# Altium PCB RM04-StartKitV1.4.PcbDoc
Units mm, origin at the board's own origin, x right, y up, seen from the top; angles counter-clockwise.
Board outline 152.4 x 101.6 mm, 2 copper layers (Top Layer, Bottom Layer); 36 components, 46 nets, 166 pads, 30 vias.
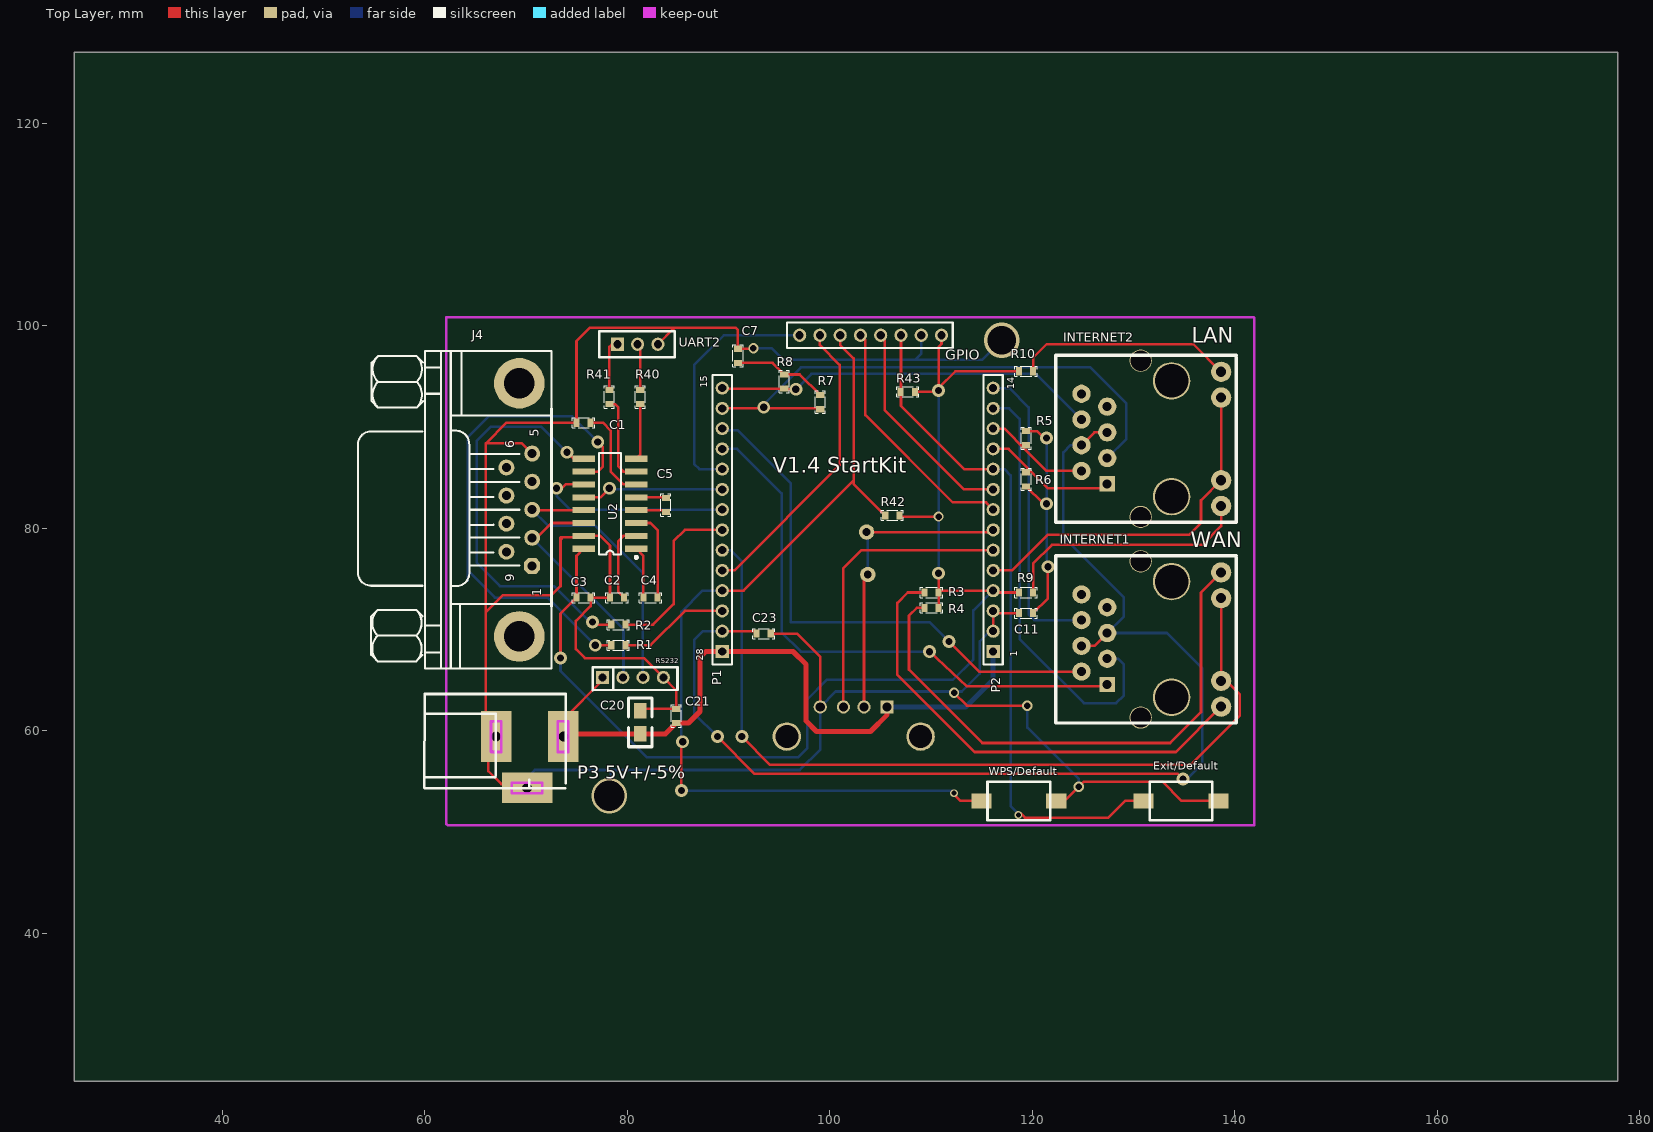
[diagram p0: Top Layer view]
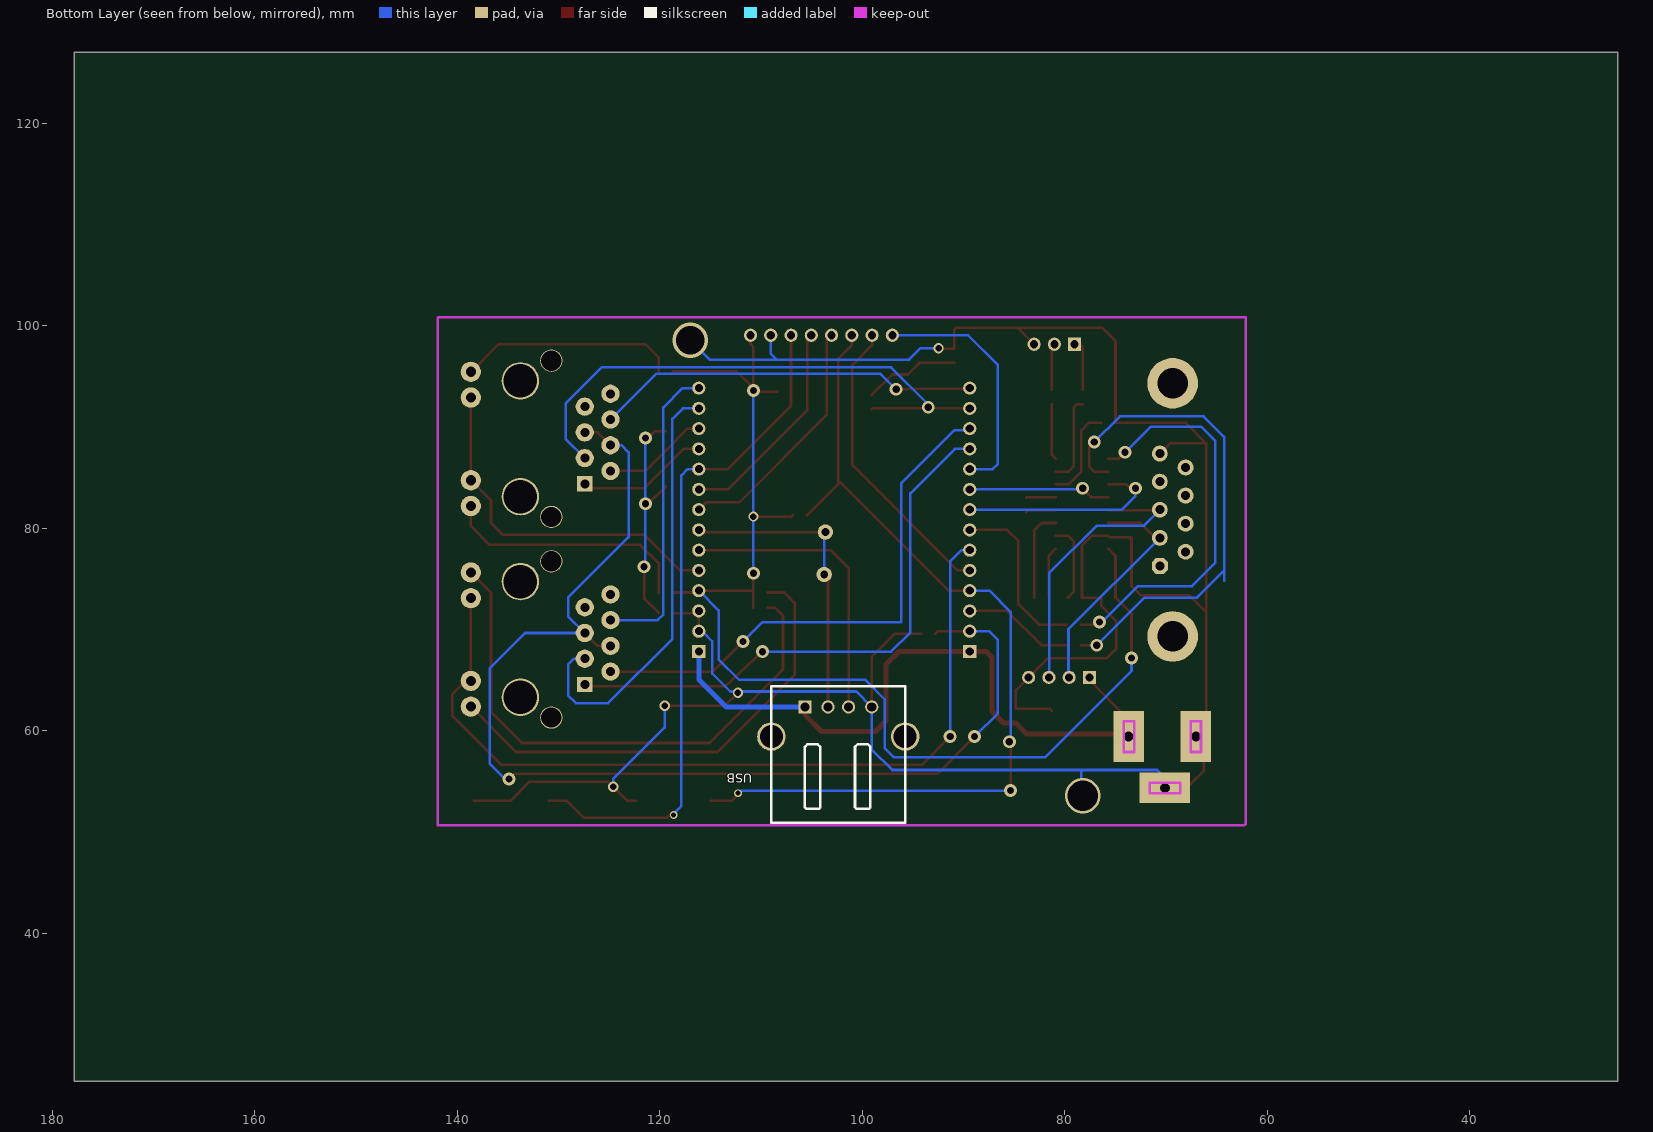
[diagram p1: Bottom Layer view, seen from below]

## Layer stack, top to bottom
Top Layer: signal copper 0.0356
Dielectric: dielectric 0.32, FR-4, Dk 4.8
Bottom Layer: signal copper 0.0356

## Board outline
25.4,25.4 177.8,25.4 177.8,127 25.4,127

## Design rules (kind name [scope] priority, off if disabled: settings)
Clearance [All] p1: gap=0.254
PolygonConnect [All] p1: connectstyle=Relief reliefconductorwidth=0.254 reliefentries=4 polygonreliefangle="90 Angle"
RoutingVias [All] p1: holewidth=0.711 width=1.27 viastyle="Through Hole" minholewidth=0.711 minwidth=1.27 maxholewidth=0.711 maxwidth=1.27
SilkscreenOverComponentPads [All] p1: minsilkscreentomaskgap=0.254
SolderMaskExpansion [All] p1: expansion=0.102
TestPointUsage [All] p1: valid=0 allowmultiple=FALSE
Testpoint [All] p1: side=15 testpointundercomponent=TRUE minsize=1.016 maxsize=2.54 preferedsize=1.524 minholesize=0 maxholesize=1.016 preferedholesize=0.813 testpointgrid=0.025 style=1023 order=0123456789
Width [All] p1: maxlimit=0.5 minlimit=0.254 preferedwidth=0.254 toplayer_prefwidth=0.3 bottomlayer_prefwidth=0.3 minimp=50.000000 maximp=50.000000 favimp=50.000000
23 further rules are at their usual default settings.

## Classes and differential pairs
component class RM04-KIT: C1 C2 C3 C4 C5 C7 C11 C20 C21 C23 ENTERNET2 INTERNET1 INTERNET2 J4 P1 P2 P3 "P3 5V+/-5%" R1 R2 R3 R4 R5 R6 R7 R8 R9 R10 U2 UART2 USB

## Components (designator, comment, footprint, x,y, rotation, side; value= is the part's Value field where it differs from the comment)
C1 "105" 0603 75.692,90.424 r0 top
C2 "105" 0603 78.994,73.152 r0 top
C3 "105" 0603 75.692,73.152 r180 top
C4 "105" 0603 82.296,73.152 r0 top
C5 "105" 0603 83.82,82.296 r90 top
C7 "0.01u" 0603 90.932,97.028 r270 top
C11 "0.01u" 0603 119.38,71.628 r0 top
C20 "10u" 0805 81.28,61.976 r270 top
C21 "0.01u" 0603 84.836,61.468 r270 top
C23 "0.01u" 0603 93.472,69.596 r180 top
Exit/Default "SW-PROG" SWITCH 131.572,53.086 r0 top
GPIO "Comment" HDR1X8 97.028,99.06 r0 top
INTERNET1 "HR911105A" HR911105A 132.08,69.596 r0 top
INTERNET2 "HR911105A" HR911105A 132.08,89.408 r0 top (schematic designator ENTERNET2)
J4 "DB9" DB9S 70.612,87.376 r90 top
P1 "Header 14" H1*14-2.0 89.324,67.818 r90 top
P2 "Header 14" H1*14-2.0 116.078,67.818 r90 top
"P3 5V+/-5%" "Header 3" POWER_STK1 70.612,59.436 r0 top (schematic designator P3)
R1 "0" 0603 79.121,68.453 r0 top
R2 "0" 0603 79.121,70.485 r0 top
R3 "660" 0603 110.044,73.66 r180 top
R4 "660" 0603 110.044,72.136 r0 top
R5 "50" 0603 119.38,88.9 r90 top
R6 "50" 0603 119.38,84.836 r90 top
R7 "50" 0603 99.06,92.456 r90 top
R8 "50" 0603 95.504,94.488 r90 top
R9 "660" 0603 119.38,73.66 r0 top
R10 "660" 0603 119.38,95.504 r180 top
R40 "0" 0603 81.28,92.964 r270 top
R41 "0" 0603 78.232,92.964 r270 top
R42 "0" 0603 106.172,81.28 r180 top (schematic designator R1)
R43 "0" 0603 107.696,93.472 r0 top (schematic designator R1)
U2 "MAX232ACPE" MAX3232 79.756,87.376 r270 top
UART2 "Header 2" MHDR2 79.756,98.044 r0 top
USB "Header 4" USB-ACPT 102.108,62.484 r270 bottom
WPS/Default "SW-PROG" SWITCH 115.57,53.086 r0 top

## Footprints (in the part's own frame and the unit in brackets; to place one, negate y for a bottom-side part, rotate by r counter-clockwise, add the part's x,y. Pads: shape width x height; smd on the part's side, far side on the other; paste and mask are expansions set on the pad)
0603 [mm]
  rect 0.6x0.8 smd: 1(-0.7,0) 2(0.7,0)
  silkscreen extent -1.1,-0.5 1.1,0.5
0805 [mil]
  rect 60x50 smd: 1(-0.2,0.24) 2(89.8,0.24)
  silkscreen extent -50,-45 140,45
DB9S [mil]
  oct 62x62 hole 35: 1(-436.67,0)
  round 62 hole 35: 2(-327.5,0) 5(0,0) 6(-54.17,100) 7(-163.33,100) 8(-272.5,100) 9(-381.67,100)
  round 62.01 hole 35: 3(-218.35,0) 4(-109.17,0)
  round 196.67 hole 118.33: BO1(-710.83,50) BO2(273.33,50)
  silkscreen extent -835,-75 398,677
H1*14-2.0 [mm]
  rect 1.3x1.3 hole 0.8: 1(0.022,-0.054)
  round 1.3 hole 0.8: 2(2.022,-0.054) 3(4.022,-0.054) 4(6.022,-0.054) 5(8.022,-0.054) 6(10.022,-0.054) 7(12.022,-0.054) 8(14.022,-0.054) 9(16.022,-0.054) 10(18.022,-0.054) 11(20.022,-0.054) 12(22.022,-0.054) 13(24.022,-0.054) 14(26.022,-0.054)
  silkscreen extent -1.25,-1 27.32,0.9
HDR1X8 [mm] "Connector; Header; 8 Position"
  round 1.3 hole 0.8: 1(0,0) 2(2,0) 3(4,0) 4(6,0) 5(8,0) 6(10,0) 7(-405.197,0) 8(12,0)
  silkscreen extent -1.27,-1.27 15.11,1.27
HR911105A [mm]
  rect 1.5x1.5 hole 0.889: 1(-4.684,-5.017)
  round 1.8 hole 0.889: 2(-7.224,-3.747) 3(-4.684,-2.477) 4(-7.224,-1.207) 5(-4.684,0.063) 6(-7.224,1.333) 7(-4.684,2.603) 8(-7.224,3.873)
  round 2 hole 1: 9(6.566,-7.207) 10.(6.566,-4.667) 11(6.566,3.503) 12(6.566,6.043)
  round 2.2 hole 2: ""(-1.384,-8.287) ""(-1.384,7.143)
  round 3.7 hole 3.302 unplated: ""(1.666,-6.287) ""(1.666,5.143)
  silkscreen extent -9.76,-8.83 8.06,7.68
MAX3232 [mm]
  rect 0.6x2.2 smd: 1(9.398,1.136) 2(8.128,1.136) 3(6.858,1.136) 4(5.588,1.136) 5(4.318,1.136) 6(3.048,1.136) 7(1.778,1.136) 8(0.508,1.136) 9(0.508,-4.064) 10(1.778,-4.064) 11(3.048,-4.064) 12(4.318,-4.064) 13(5.588,-4.064) 14(6.858,-4.064) 15(8.128,-4.064) 16(9.398,-4.064)
  silkscreen extent -0.05,-2.56 10.37,1.26
MHDR2 [mm] "Connector; Header; 4 Position"
  rect 1.3x1.3 hole 0.8: 1(-0.73,0.127)
  round 1.3 hole 0.8: 2(1.27,0.127)
  silkscreen extent -2.54,-1.14 4.95,1.4
POWER_STK1 [mm]
  rect 3x5 hole 1: 1(3.075,0) 3(-3.556,0)
  rect 5x3 hole 1: 2(-0.5,-5.075)
  Keep-Out Layer lines w0.254: -4.064,-1.524 -3.048,-1.524 -3.048,1.524 -4.064,1.524 -4.064,-1.524 ; -2.032,-5.588 -2.032,-4.572 1.016,-4.572 1.016,-5.588 -2.032,-5.588 ; 2.54,-1.524 3.556,-1.524 3.556,1.524 2.54,1.524 2.54,-1.524
  silkscreen extent -10.64,-5.09 3.3,4.2
SWITCH [mm]
  rect 2x1.5 smd: 1(-0.6,0) 2(6.8,0)
  silkscreen extent 0,-1.9 6.2,1.9
USB-ACPT [mil]
  rect 51.18x51.18 hole 35.5: 1(5,-140)
  round 51.18 hole 35.5: 2(5,-50) 3(5,30) 4(5,120)
  round 110.67 hole 90 unplated: ""(120,-270) ""(120,250)
  silkscreen extent -75,-270 455,250

## Part data
C1 C2 C3 C4 C5: library part Cap, "Capacitor"
C7 C11 C20 C21 C23: library part CAP, "Capacitor"
J4: library part CON9, "Connector"
P1 P2: "Header, 14-Pin"
"P3 5V+/-5%": "Header, 3-Pin"
R1 R2 R3 R4 R5 R6 R7 R8 R9 R10 R40 R41 R42 R43: library part RES2
U2: "+5V Powered, Multi-Channel RS-232 Driver/Receiver"
UART2: "Header, 2-Pin"
USB: "Header, 4-Pin"

## Free pads (board coordinates)
  round 1.3 hole 0.8: 0(83.026,98.171) 6(79.566,65.278) 7(81.566,65.278) 8(83.566,65.278) 9(111.028,99.06)
  round 1.524 hole 0.762: 2(103.759,75.438) 3(103.632,79.629)
  rect 1.3x1.3 hole 0.8: 5(77.566,65.278)

## Via types
v1: diameter 1.27, hole 0.711, Top Layer to Bottom Layer, 21 vias
v2: diameter 1.016, hole 0.635, Top Layer to Bottom Layer, 5 vias
v3: diameter 0.762, hole 0.508, Top Layer to Bottom Layer, 2 vias
v4: diameter 3.5, hole 2.8, Top Layer to Bottom Layer, 1 vias
v5: diameter 3.5, hole 3, Top Layer to Bottom Layer, 1 vias

## Nets (pads, with @x,y where several pads share a name; then routed paths per layer and width w, separated by ;. In a path a pad name is that pad's centre, name@x,y a point inside that pad or via, vN(x,y) a via of type N, cw(c..) or ccw(c..) an arc to the next point about the centre after c; other vN are vias at no path point)
3.3VD: C3.2 P2.4 pad.9 R3.1 R4.2 R9.1 R10.2 R42.1 R43.2 U2.16 | length 121.4
  Top Layer w0.254: v1(73.406,67.183) 73.406,71.566 C3.2 74.992,77.278 U2.16 ; R42.1 106.999,81.153 v2@110.363,81.153 ; R43.2 110.617,93.472 v1(110.744,93.599) 110.744,97.917 111.028,98.201 pad.9 ; R4.2 R3.1 ; v1(110.744,75.565) R3.1 ; v1@110.744,93.853 112.395,95.504 R10.2 ; R9.1 116.312,73.66 P2.4 110.924,73.84 R3.1
  Bottom Layer w0.254: v1(73.406,67.183) 73.406,65.913 81.915,57.404 96.901,57.404 97.79,58.293 97.79,63.119 99.695,65.024 112.141,65.024 114.173,67.056 114.173,71.881 P2.4 ; v1(110.744,75.565) v1(110.744,93.599)
  other v2: 110.744,81.153
CTS_N: GPIO.2 P1.5 | length 29.5
  Top Layer w0.254: P1.5 90.572,75.84 100.965,86.233 100.965,96.139 99.028,98.076 GPIO.2
GND: "P3 5V+/-5%.2" "P3 5V+/-5%.3" C1.1 C2.1 C3.1 C7.1 C11.1 C20.1 C21.1 C23.1 Exit/Default.2 GPIO.8 J4.5 P2.2 P2.3 pad.0 pad.8 U2.15 USB.4 WPS/Default.2 | length 275.3
  Top Layer w0.254: 67.056,58.209 66.294,57.448 66.04,57.702 66.04,59.436 ; 67.056,58.801 67.056,59.436 ; 67.056,60.452 67.056,59.436 ; 70.112,54.361 69.736,54.737 67.564,54.737 66.294,56.007 66.294,58.674 67.056,59.436 ; J4.5 69.596,88.392 66.04,88.392 ; 73.914,79.121 73.66,79.121 73.448,78.909 73.448,79.121 ; C20.1 81.473,62.168 C21.1 84.836,64.008 pad.8 81.661,67.183 75.819,67.183 74.93,68.072 74.93,70.866 76.392,72.328 C3.1 C2.1 78.294,78.297 77.343,79.248 U2.15 75.565,79.121 73.448,79.121 ; pad.0 84.582,99.727 84.582,99.822 ; v2(92.456,97.79) 92.394,97.728 C7.1 90.932,99.568 90.678,99.822 76.327,99.822 74.992,98.487 C1.1 68.072,90.424 66.04,88.392 ; C23.1 96.774,69.596 99.06,67.31 USB.4 ; v2(112.268,63.754) 113.538,62.484 v2(119.507,62.484) ; P2.2 P2.3 116.344,71.628 C11.1 ; WPS/Default.2 123.19,53.086 125.095,54.991 132.842,54.991 134.747,53.086 Exit/Default.2 ; 66.04,59.436 67.056,59.436 ; 66.04,59.436 66.04,71.713 ; 66.04,71.713 66.04,88.392 ; 66.04,71.713 67.733,73.406 72.517,73.406 73.406,74.295 73.406,79.079 73.448,79.121
  Bottom Layer w0.254: 70.112,55.372 70.874,56.134 78.359,56.134 ; v5@78.359,53.721 78.359,56.134 ; v2(92.456,97.79) 94.234,97.79 95.377,96.647 108.458,96.647 ; GPIO.8 109.028,97.217 108.458,96.647 ; P2.2 115.888,69.596 115.57,69.596 114.808,68.834 114.808,65.659 113.03,63.881 100.584,63.881 USB.4 99.06,58.166 97.028,56.134 78.359,56.134 ; v4(116.967,98.552) 115.062,96.647 108.458,96.647 ; v2(119.507,62.484) 119.507,60.325 124.587,55.245 v2(124.587,54.483)
  other v5: 78.232,53.594
GPIO0: Exit/Default.1 GPIO.6 P2.10 R43.1 | length 67.5
  Top Layer w0.254: GPIO.6 107.028,92.084 113.272,85.84 P2.10 ; v3@118.872,51.816 119.253,51.435 127.508,51.435 129.159,53.086 Exit/Default.1
  Bottom Layer w0.254: P2.10 117.233,85.84 117.856,85.217 117.856,52.578 v3@118.745,51.689
  other v3: 118.618,51.689
I2C_CLK: GPIO.5 P2.9 | length 21.5
  Top Layer w0.254: GPIO.5 105.41,98.678 105.41,91.694 113.264,83.84 P2.9
I2C_SD: GPIO.4 P2.8 | length 24.6
  Top Layer w0.254: GPIO.4 103.505,98.583 103.505,91.186 112.141,82.55 115.422,82.55 P2.8
LINK3: INTERNET2.10. INTERNET2.11 P2.5 | length 35.7
  Top Layer w0.254: P2.5 118.004,75.84 121.539,79.375 135.509,79.375 136.652,80.518 136.652,82.747 INTERNET2.10. INTERNET2.11
LINK4: INTERNET1.10. INTERNET1.11 P1.6 | length 85.8
  Top Layer w0.254: v1(91.313,59.436) 94.107,56.642 135.636,56.642 140.462,61.468 140.462,63.627 139.16,64.929 INTERNET1.10. INTERNET1.11 138.646,73.317 INTERNET1.11@138.176,73.787
  Bottom Layer w0.254: P1.6@89.165,77.84 90.181,77.84 91.313,76.708 v1(91.313,59.436)
NetC1_2: C1.2 U2.6 | length 9.4
  Top Layer w0.254: C1.2 77.597,90.424 78.359,89.662 78.359,85.598 79.629,84.328 U2.6
NetC2_2: C2.2 U2.2 | length 7.8
  Top Layer w0.254: C2.2 79.121,73.725 79.121,78.74 79.629,79.248 U2.2
NetC4_1: C4.1 U2.1 | length 5.1
  Top Layer w0.254: U2.1 81.596,77.274 C4.1
NetC4_2: C4.2 U2.3 | length 9.1
  Top Layer w0.254: U2.3 82.296,80.518 82.996,79.818 C4.2
NetC5_1: C5.1 U2.4 | length 3
  Top Layer w0.254: U2.4 83.628,81.788 C5.1
NetC5_2: C5.2 U2.5 | length 3
  Top Layer w0.254: U2.5 83.758,83.058 C5.2
NetC7_2: C7.2 R7.2 R8.2 | length 9.4
  Top Layer w0.254: C7.2 94.364,96.328 R8.2 97.028,95.188 R7.2
NetC11_2: C11.2 R5.2 R6.1 | length 22.5
  Top Layer w0.254: R6.1 121.031,82.485 v1@121.031,82.296 ; R5.2 120.458,89.6 v1@121.158,88.9 ; C11.2 121.539,73.087 v1(121.539,76.2)
  Bottom Layer w0.254: v1(121.412,88.9) v1(121.412,82.423) 121.412,76.327 v1(121.539,76.2)
NetENTERNET2_9: INTERNET2.9 R9.2 | length 24.9
  Top Layer w0.254: R9.2 120.08,76.519 121.92,78.359 136.779,78.359 138.646,80.226 INTERNET2.9
NetENTERNET2_12: INTERNET2.12 R10.1 | length 21.6
  Top Layer w0.254: R10.1 120.08,96.839 121.412,98.171 135.926,98.171 INTERNET2.12
NetINTERNET1_9: INTERNET1.9 R3.2 | length 47.2
  Top Layer w0.254: R3.2 107.696,73.66 106.68,72.644 106.68,65.532 114.3,57.912 134.169,57.912 INTERNET1.9
NetINTERNET1_12: INTERNET1.12 R4.1 | length 54.9
  Top Layer w0.254: R4.1 108.585,72.136 107.823,71.374 107.823,66.04 115.062,58.801 133.604,58.801 136.652,61.849 136.652,73.645 INTERNET1.12
NetR1_1: R1.1 U2.10 | length 51.4
  Top Layer w0.254: U2.10 77.089,85.598 77.597,86.106 77.597,88.011 v1(77.089,88.519) ; v1(76.835,68.453) R1.1
  Bottom Layer w0.254: 64.262,74.803 64.262,75.819 ; v1(77.089,88.519) 74.549,91.059 66.294,91.059 64.262,89.027 64.262,75.819 ; v1@77.343,68.453 v1(76.835,68.453) 72.136,73.152 66.929,73.152 64.262,75.819
NetR2_1: R2.1 U2.9 | length 39.6
  Top Layer w0.254: v1(74.041,87.503) 74.676,86.868 U2.9 ; v1@76.835,70.612 76.962,70.485 R2.1
  Bottom Layer w0.254: v1(74.041,87.503) 71.501,90.043 66.548,90.043 65.151,88.646 65.151,76.581 67.437,74.295 72.771,74.295 v1@76.263,70.802
  other v1: 76.581,70.739
NetR40_1: R40.1 UART2.2 | length 4.6
  Top Layer w0.254: UART2.2 81.28,97.917 R40.1
NetR40_2: R40.2 U2.8 | length 5.6
  Top Layer w0.254: U2.8 81.28,87.256 R40.2
NetR41_1: R41.1 UART2.1 | length 4.9
  Top Layer w0.254: R41.1 78.232,97.917 78.486,98.171 UART2.1@78.74,98.171
NetR41_2: R41.2 U2.7 | length 8.8
  Top Layer w0.254: R41.2 78.805,92.264 79.121,91.948 79.121,86.106 79.629,85.598 U2.7
RIN: GPIO.3 P1.4 R42.2 WPS/Default.1 | length 89.6
  Top Layer w0.254: v1@85.344,54.356 85.344,58.801 v1(85.471,58.928) ; P1.4 91.493,73.84 102.362,84.709 ; GPIO.3 101.028,98.108 102.362,96.774 102.362,84.709 ; R42.2 102.362,84.39 102.362,84.709 ; v3(112.268,53.848) 112.268,53.721 112.903,53.086 WPS/Default.1
  Bottom Layer w0.254: v1(85.344,54.102) 110.871,54.102 112.014,54.102 v3(112.268,53.848) ; v1(85.471,58.928) 85.344,59.055 85.344,71.755 87.429,73.84 P1.4
RTS_N: GPIO.1 P1.10 | length 24.4
  Bottom Layer w0.254: P1.10 87.134,85.84 86.614,86.36 86.614,96.139 89.535,99.06 GPIO.1
RX: J4.3 pad.7 U2.13 | length 28.5
  Top Layer w0.254: J4.3 70.654,81.788 U2.13 U2.13@75.65,81.83
  Bottom Layer w0.254: J4.3 72.178,80.264 76.835,80.264 81.534,75.565 pad.7@81.534,65.786
RXD: P1.7 R2.2 | length 17.1
  Top Layer w0.254: R2.2 82.55,70.485 84.582,72.517 84.582,78.74 85.682,79.84 87.176,79.84 P1.7
RXIN3: INTERNET2.6 P1.14 R8.1 | length 38
  Top Layer w0.254: P1.14@89.378,93.788 R8.1 95.566,93.726 v1(96.647,93.726)
  Bottom Layer w0.254: v1(96.647,93.726) 98.171,95.25 120.347,95.25 INTERNET2.6
RXIN4: INTERNET1.6 P2.14 | length 30.2
  Bottom Layer w0.254: P2.14 117.742,93.84 119.634,91.948 119.634,71.501 120.206,70.929 INTERNET1.6
RXIP3: INTERNET2.3 P1.13 R7.1 | length 54.9
  Top Layer w0.254: P1.13 98.976,91.84 R7.1
  Bottom Layer w0.254: v1@93.726,91.948 93.726,92.452 97.159,95.885 125.73,95.885 129.286,92.329 129.286,88.821 INTERNET2.3
  other v1: 93.472,91.948
RXIP4: INTERNET1.3 P2.13 | length 42.9
  Bottom Layer w0.254: P2.13 117.71,91.84 118.745,90.805 118.745,69.088 125.095,62.738 128.27,62.738 129.032,63.5 129.032,66.548 128.461,67.119 INTERNET1.3
TX: J4.2 pad.6 U2.14 | length 22.9
  Top Layer w0.254: J4.2 71.056,79.057 72.517,80.518 U2.14
  Bottom Layer w0.254: J4.2 79.629,70.041 pad.6@79.629,65.532
TXD: P1.3 R1.2 | length 11.1
  Top Layer w0.254: R1.2 82.296,68.453 85.683,71.84 87.176,71.84 ; 86.995,71.84 P1.3
TXON3: INTERNET2.2 P2.12 R5.1 | length 10.5
  Top Layer w0.254: P2.12 117.232,89.84 119.38,87.692 121.411,85.661 INTERNET2.2
TXON4: INTERNET1.2 P1.12 | length 53.9
  Top Layer w0.254: v1(111.76,68.834) 114.745,65.849 INTERNET1.2
  Bottom Layer w0.254: P1.12@89.535,89.662 90.932,89.662 ; 90.297,89.662 90.932,89.662 ; v1(111.76,68.834) 109.855,70.739 96.139,70.739 96.139,84.455 90.932,89.662
TXOP3: INTERNET2.1 P2.11 R6.2 | length 13.2
  Top Layer w0.254: P2.11 117.646,87.84 121.539,83.947 126.952,83.947 INTERNET2.1 INTERNET2.1@127.333,84.328
TXOP4: INTERNET1.1 P1.11 | length 55.8
  Top Layer w0.254: v1(109.855,67.818) 113.538,64.389 127.206,64.389 INTERNET1.1
  Bottom Layer w0.254: P1.11 90.849,87.84 95.25,83.439 95.25,69.723 97.155,67.818 v1(109.855,67.818)
UART_RX: P1.9 U2.12 | length 15.4
  Top Layer w0.254: U2.12 77.343,83.058 v1(78.232,83.947)
  Bottom Layer w0.254: v1(78.232,83.947) 78.339,83.84 88.519,83.84 ; 87.176,83.84 88.519,83.84 ; P1.9 88.519,83.84
UART_TX: P1.8 U2.11 | length 19.6
  Top Layer w0.254: v1@73.279,83.693 73.914,84.328 U2.11
  Bottom Layer w0.254: 73.025,83.185 74.37,81.84 P1.8
  other v1: 73.025,83.947
USB_M: P2.7 pad.2 pad.3 USB.2 | length 30.1
  Top Layer w0.254: pad.2@103.505,75.692 103.378,75.565 USB.2 USB.2@103.632,62.611 ; pad.3 115.921,79.629 P2.7
  Bottom Layer w0.254: pad.2 pad.3@103.759,79.248
USB_P: P2.6 USB.3 | length 29.2
  Top Layer w0.254: USB.3 101.346,76.073 103.113,77.84 P2.6
VDD_1.8V: C23.2 INTERNET1.4 INTERNET1.5 INTERNET2.4 INTERNET2.5 P1.2 | length 117.3
  Top Layer w0.254: v1(88.9,59.436) 92.583,55.753 132.461,55.753 ; P1.2 92.528,69.84 C23.2 ; INTERNET1.4 126.126,68.389 INTERNET1.5 ; INTERNET2.4 126.126,89.471 INTERNET2.5 ; 132.798,55.753 132.461,55.753 ; v1(134.874,55.245) 134.366,55.753 132.461,55.753
  Bottom Layer w0.254: v1(88.9,59.436) 86.614,61.722 86.614,68.961 87.493,69.84 P1.2 ; INTERNET2.4 123.761,88.201 123.063,87.503 123.063,79.121 129.032,73.152 129.032,71.295 INTERNET1.5 133.287,69.659 136.779,66.167 136.779,56.769 v1@134.874,54.864
VDD_5V: "P3 5V+/-5%.1" C20.2 C21.2 P1.1 P2.1 pad.5 USB.1 | length 69.3
  Top Layer w0.254: 73.687,60.352 73.687,59.436 73.687,61.114 77.566,64.993 pad.5 ; 74.676,59.436 74.935,59.695 ; 87.176,67.056 87.176,67.259 87.757,67.84 ; 105.664,61.595 USB.1
  Top Layer w0.5: 74.935,59.695 C20.2 83.763,59.695 C21.2 86.041,60.768 87.176,61.903 87.176,67.259 87.757,67.84 96.371,67.84 97.663,66.548 97.663,60.96 98.679,59.944 104.013,59.944 105.664,61.595
  Bottom Layer w0.5: USB.1 113.411,62.357 116.132,65.078 P2.1
pads on no net: GPIO.7 INTERNET1. INTERNET1.7 INTERNET1.8 INTERNET2. INTERNET2.7 INTERNET2.8 J4.1 J4.4 J4.6 J4.7 J4.8 J4.9 J4.BO1 J4.BO2 USB.

## Keep-outs
Keep-Out Layer:
  lines w0.254: 62.123,50.801 62.123,95.549 ; 62.123,94.996 62.123,100.82 ; 62.136,50.801 62.278,50.659 63.536,50.659 63.552,50.674 ; 62.19,100.82 63.951,100.82 ; 63.548,100.82 84.768,100.82 ; 63.55,50.656 139.626,50.656 ; 84.938,100.82 136.246,100.82 ; 135.607,100.82 141.837,100.82 ; 139.327,50.658 141.921,50.658 141.921,95.373 ; 141.925,100.318 141.925,100.792 ; 141.929,95.306 141.929,100.358

## Silkscreen, mask and mechanical layers (free items; w line width, h text height)
Top Overlay:
  lines w0.254: 78.613,64.135 78.613,66.167 ; 84.709,96.901 84.709,99.441 ; 76.581,64.019 84.963,64.069 84.963,66.291 76.581,66.299 76.581,64.019
  text "LAN" at 135.763,98.298 h1.52
  text "15" at 87.884,93.853 h0.7 r90
  text "14" at 118.237,93.726 h0.7 r90
  text "V1.4 StartKit" at 94.361,85.471 h1.52
  text "WAN" at 135.636,78.105 h1.52
  text "1" at 118.491,67.31 h0.7 r90
  text "28" at 87.503,66.929 h0.7 r90
  text "RS232" at 82.804,66.675 h0.51

## Text inside footprints (layer, text, board x,y; h text height)
J4: Top Overlay "6" at 68.834,87.926 h0.89 r90; Top Overlay "1" at 71.501,73.279 h0.89 r90; Top Overlay "5" at 71.247,89.027 h0.89 r90; Top Overlay "9" at 68.834,74.718 h0.89 r90